# EAGLE board Thetis_RevD1_PCB (EAGLE 9.7.0)
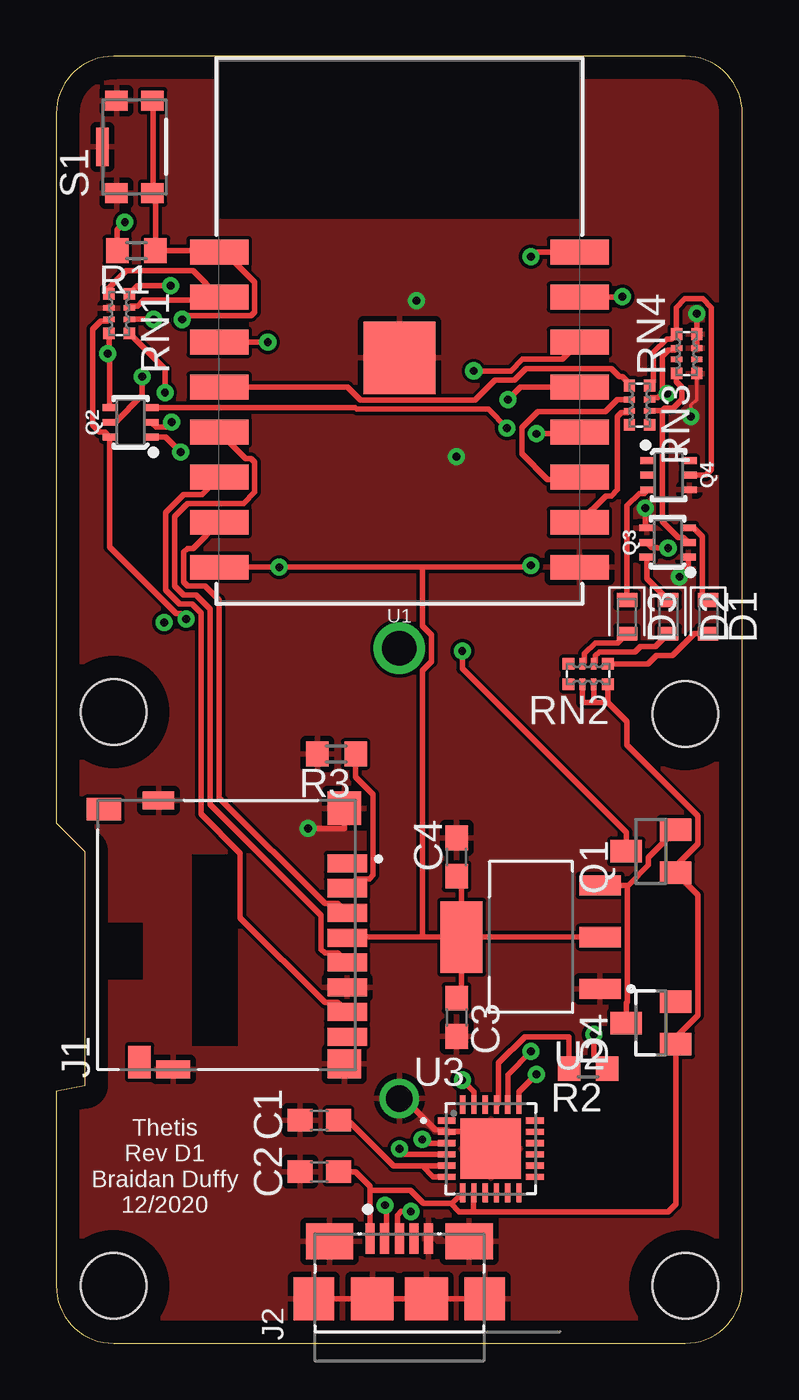
[diagram p0: board, top side]
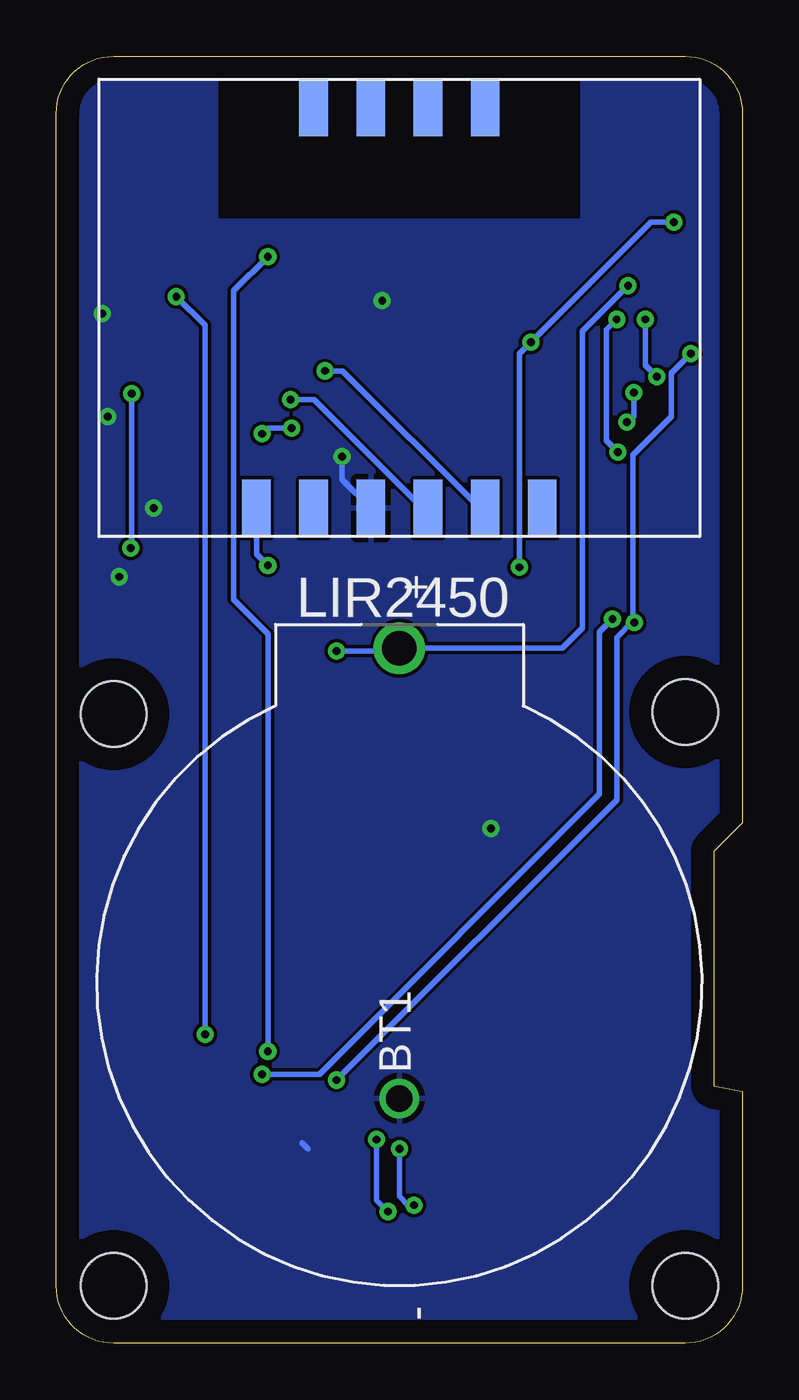
[diagram p1: board, bottom side, seen from below]

Size 30.48 x 57.15 mm. Coordinates in mm from the lower left corner, seen from the top.
Outline: 0,11.18 0,2.54 arc90 2.54,0 27.94,0 arc90 30.48,2.54 30.48,54.61 arc90 27.94,57.15 2.54,57.15 arc90 0,54.61 0,23.11 1.27,21.84 1.27,11.43 0,11.18
Copper layers (1*16): Top 0.035mm / dielectric 1.5mm / Bottom 0.035mm
Design rules "default": minimum track width 6mil, minimum drill 0.35mm, track to track 6mil, track to pad 6mil, pad to pad 6mil, via to via 6mil, smd to smd 6mil, copper to edge 40mil, drill to drill 6mil, minimum pad ring 10mil, minimum via ring 8mil, stop-mask expansion 4mil, vias tented up to drill 0mil, thermal gap 10mil
Holes 2.92 mm at 2.54,2.54 2.54,28.03 27.94,27.94 27.94,2.54
tKeepout: area 0,25.4 to 5.1,30.5; area 25.4,25.4 to 30.5,30.5; area 0,0 to 5.1,5.1; area 25.4,0 to 30.5,5.1
bKeepout: area 0,25.4 to 5.1,30.5; area 25.4,25.4 to 30.5,30.5; area 0,0 to 5.1,5.1; area 25.4,0 to 30.5,5.1

## Footprints (pad centres in the part's own frame; a part is rotated, then mirrored left to right if it is on the bottom)
BAT_BS-2450 = drill 1.52: + 14.86,0 | drill 1.17: - -5.14,0
C0603 = smd 1.1 x 1: 1 -0.85,0; 2 0.85,0
LEDC1608X65N = smd 0.612 x 0.912: A 0.75,0; C -0.75,0
SOT23 = smd 1 x 1.4: 1 -0.95,-1.1; 2 0.95,-1.1; 3 0,1.1
HRS_DM3D-SF = smd 0.8 x 1.75: 1 3.2,0; 2 2.1,0; 3 1,0; 4 -0.1,0; 5 -1.2,0; 6 -2.3,0; 7 -3.4,0; 8 -4.5,0 | smd 1.3 x 1.5: S1 -5.7,0.125 | smd 1.5 x 1.5: S2 5.65,0.125 | smd 0.8 x 1.5: S3 -5.95,7.725 | smd 0.8 x 1.4: S4 6,8.375 | smd 1 x 1.55: SW-A 5.6,10.8 | smd 1.45 x 1: SW-B -5.625,9.225
AMPHENOL_10118192-0001LF = smd 0.4 x 1.35: 1 -1.3,0; 2 -0.65,0; 3 0,0; 4 0.65,0; 5 1.3,0 | smd 2.1 x 1.6: SH1 -3.1,-0.125; SH2 3.1,-0.125 | smd 1.8 x 1.9: SH3 -3.8,-2.675; SH6 3.8,-2.675 | smd 1.9 x 1.9: SH4 -1.2,-2.675; SH5 1.2,-2.675
SC70-6 = smd 0.3 x 0.66: 1 -0.65,-0.92; 2 0,-0.92; 3 0.65,-0.92; 4 0.65,0.92; 5 0,0.92; 6 -0.65,0.92
R0603 = smd 1 x 1.1: 1 -0.85,0; 2 0.85,0
EXB28V = smd 0.525 x 0.5: 1 -0.875,-0.45; 4 0.875,-0.45; 5 0.875,0.45; 8 -0.875,0.45 | smd 0.25 x 0.5: 2 -0.25,-0.45; 3 0.25,-0.45; 6 0.25,0.45; 7 -0.25,0.45
SW_KMR221GLFS = smd 0.9 x 1: 1 -2.05,0.8; 2 -2.05,-0.8; 3 2.05,-0.8; 4 2.05,0.8 | smd 1.7 x 0.55: 5 0,1.425
ESP-12S = smd 2.6 x 1.1: 1 -8,3.5; 2 -8,1.5; 3 -8,-0.5; 4 -8,-2.5; 5 -8,-4.5; 6 -8,-6.5; 7 -8,-8.5; 8 -8,-10.5; 9 8,-10.5; 10 8,-8.5; 11 8,-6.5; 12 8,-4.5; 13 8,-2.5; 14 8,-0.5; 15 8,1.5; 16 8,3.5 | smd 3.2 x 3.2: P$1 0,-1.2
SOT230P700X180-4N = smd 1.86 x 0.9: 1 -3.075,2.3; 2 -3.075,0; 3 -3.075,-2.3 | smd 1.86 x 3.19: 4 3.075,0
QFN50P400X400X80-25N = smd 0.81 x 0.26: 1 -1.955,1.25; 2 -1.955,0.75; 3 -1.955,0.25; 4 -1.955,-0.25; 5 -1.955,-0.75; 6 -1.955,-1.25; 13 1.955,-1.25; 14 1.955,-0.75; 15 1.955,-0.25; 16 1.955,0.25; 17 1.955,0.75; 18 1.955,1.25 | smd 0.26 x 0.81: 7 -1.25,-1.955; 8 -0.75,-1.955; 9 -0.25,-1.955; 10 0.25,-1.955; 11 0.75,-1.955; 12 1.25,-1.955; 19 1.25,1.955; 20 0.75,1.955; 21 0.25,1.955; 22 -0.25,1.955; 23 -0.75,1.955; 24 -1.25,1.955 | smd 2.68 x 2.68: 25 0,0
ADAFRUIT-BNO055-BREAKOUT-SMD = smd 2.54 x 1.27: P$1 -8.89,6.35; P$2 -8.89,3.81; P$3 -8.89,1.27; P$4 -8.89,-1.27; P$5 -8.89,-3.81; P$6 -8.89,-6.35; P$7 8.89,3.81; P$8 8.89,1.27; P$9 8.89,-1.27; P$10 8.89,-3.81

## Placement (x,y rotation side)
BT1  BS-2450  [BAT_BS-2450]  15.24,16 90 bottom
C1  1 uF  [C0603]  11.68,9.91 180 top
C2  1 uF  [C0603]  11.68,7.62 180 top
C3  10 uF  [C0603]  17.78,14.48 270 top
C4  10 uF  [C0603]  17.78,21.59 90 top
D1  GRN  [LEDC1608X65N]  28.96,32.26 270 top
D2  GRN  [LEDC1608X65N]  27.18,32.26 270 top
D3  GRN  [LEDC1608X65N]  25.35,32.26 270 top
D4  BAT400  [SOT23]  26.42,14.22 90 top
J1  DM3D-SF  [HRS_DM3D-SF]  12.92,18.11 90 top
J2  10118192-0001LF  [AMPHENOL_10118192-0001LF]  15.24,4.64 0 top
Q1  DMG3414U-7  [SOT23]  26.42,21.84 90 top
Q2  MMBT2222N  [SC70-6]  3.3,40.89 90 top
Q3  MMBT2222N  [SC70-6]  27.16,35.56 90 top
Q4  MMBT2222N  [SC70-6]  27.2,38.55 270 top
R1  10k  [R0603]  3.56,48.51 180 top
R2  1k  [R0603]  23.62,12.19 180 top
R3  10k  [R0603]  12.45,26.16 180 top
RN1  10k  [EXB28V]  2.79,45.72 270 top
RN2  1k  [EXB28V]  23.62,29.72 180 top
RN3  1k  [EXB28V]  25.91,41.66 270 top
RN4  10k  [EXB28V]  28,43.94 90 top
S1  KMR221GLFS  [SW_KMR221GLFS]  3.48,53.13 90 top
U1  ESP-12S  [ESP-12S]  15.24,44.96 0 top
U2  AZ1117EH-5.0TRG1  [SOT230P700X180-4N]  21.08,18.03 180 top
U3  CP2104-F03-GM  [QFN50P400X400X80-25N]  19.3,8.64 0 top
U4  ADAFRUIT-BNO055-BREAKOUT-SMD  [ADAFRUIT-BNO055-BREAKOUT-SMD]  15.24,45.97 90 bottom

## Library data of the parts
BT1 = BS-2450; AVAILABILITY: Unavailable; DESCRIPTION: Battery Holder _Open_ Coin, 24.5mm 1 Cell PC Pin; MF: MPD; MP: BS-2450; PACKAGE: Non-Standard MPD; PRICE: None
C1-C4 = rcl; SPICEPREFIX: C
D1-D3 = LED; CATEGORY: LED; COLOR: GREEN; DESCRIPTION: CHIP LED ROUND; SUB-CATEGORY: CHIP; TYPE: ROUND_TOP
D4 = diode
J1 = DM3D-SF; MANUFACTURER: Hirose; MAXIMUM_PACKAGE_HEIGHT: 1.55mm; PARTREV: 2017.1; STANDARD: Manufacturer Recommendations
J2 = MicroUSB; MANUFACTURER: Amphenol; PARTREV: B; STANDARD: Manufacturer Recommendation
Q1 = Transistor; CATEGORY: Transistor; SUB-CATEGORY: MOSFET; TYPE: N-Channel
Q2-Q4 = SparkFun-DiscreteSemi-Poseidon-Edit; PROD_ID: TRANS-13337
R1-R3 = rcl; SPICEPREFIX: R
RN1-RN4 = resistor-dil-Poseidon-Edit; OC_FARNELL: unknown; OC_NEWARK: unknown
S1 = KMR221GLFS; MANUFACTURER: CnK
U1 = ESP-12S; PROD_ID: IC-14115
U2 = AZ1117EH-5.0TRG1; ARROW_ELECTRONICS-PURCHASE-URL: https://snapeda.com/shop?store=Arrow+Electronics&id=482930; AVAILABILITY: Good; DESCRIPTION: Linear Voltage Regulator IC 1 Output 1A SOT-223; DIGIKEY-PURCHASE-URL: https://snapeda.com/shop?store=DigiKey&id=482930; MF: Diodes Inc.; MOUSER-PURCHASE-URL: https://snapeda.com/shop?store=Mouser&id=482930; MP: AZ1117EH-5.0TRG1; PACKAGE: SOT-223 Diodes Inc.; PRICE: None
U3 = CP2104; MANUFACTORER: Silicon Labs; PARTREV: 1.0; STANDERD: IPC-7351B
U4 = EVE-ECAD-Library

## Nets
3.3V: C3.1 C4.1 J1.4 R1.2 U1.3 U1.8 U2.2 U2.4 U4.P$1
3V3: U4.P$2
!DTR: Q2.4 RN1.4 U3.23
!RTS: Q2.6 RN1.3 U3.19
ACAL_LED: RN3.3 U1.10
ADC: RN1.1 RN1.7 U1.2
ESP_RX: R2.1 U1.15
ESP_TX: U1.16 U3.20
GCAL_LED: RN3.2 U1.11
GND: BT1.- C1.2 C2.2 C3.2 C4.2 J1.6 J1.S1 J1.S2 J1.S3 J1.S4 J2.5 J2.SH1 J2.SH2 J2.SH3 J2.SH4 J2.SH5 J2.SH6 Q3.1 Q3.4 Q4.4 R3.2 RN1.2 RN4.1 RN4.3 RN4.4 S1.1 S1.4 S1.5 U1.9 U1.P$1 U2.1 U3.2 U3.25 U4.P$3
IO0: Q2.3 U1.12
MCAL_LED: RN3.1 U1.4
MISO: J1.7 U1.6
MOSI: J1.3 U1.7
N$1: J1.2 R3.1
N$2: C1.1 U3.5 U3.6
N$3: R2.2 U3.21
N$4: J2.3 U3.3
N$5: J2.2 U3.4
N$6: Q3.5 RN3.7 RN4.6
N$7: Q2.2 RN1.5
N$8: D1.C Q3.3
N$9: Q2.5 RN1.6
N$10: D1.A RN2.1
N$11: D2.A RN2.2
N$12: D2.C Q3.6
N$13: D4.3 Q1.2 U2.3
N$14: Q3.2 RN3.6 RN4.8
N$15: Q4.5 RN3.8 RN4.5
N$16: D3.C Q4.3
N$17: D3.A RN2.3
RST: Q2.1 R1.1 S1.2 S1.3 U1.1
SCK: J1.5 U1.5
SCL: U1.14 U4.P$5
SDA: U1.13 U4.P$4
V_BATT: BT1.+ Q1.3 RN1.8
V_USB: C2.1 D4.1 J2.1 Q1.1 RN2.6 RN2.7 RN2.8 U3.7 U3.8

## Tracks (layer width: path | path; a pad name or v marks a point on that pad's centre or on a via)
3.3V  (via drill 0.35)
  Top 0.254: U2.4 18.01,20.51 C4.1 | U2.4 18.01,15.55 C3.1 | U2.2 U2.4 | U1.8 v9.91,34.46 16.26,34.46 | 16.26,34.46 21,34.46 v21.08,34.54 | U2.4 16.26,18.03 | 16.26,18.03 12.95,18.03 J1.4 | 16.26,34.46 16.26,31.86 16.66,31.45 16.66,30.28 16.26,29.87 16.26,18.03 | R1.2 2.71,49.44 v3.05,49.78 | v9.4,44.45 U1.3
  Bottom 0.254: v21.08,34.54 21.59,35.05 U4.P$1 | v3.05,49.78 4.06,49.78 v9.4,44.45 9.91,43.94 v9.91,34.46
!DTR  (via drill 0.35)
  Top 0.254: U3.23 18.55,11.16 v18.03,11.68 | RN1.4 2.34,44 v2.29,43.94 2.38,43.85 Q2.4
  Bottom 0.254: v18.03,11.68 5.59,24.13 5.59,31.34 4.86,32.06 | 4.86,32.06 v4.8,32 | 4.86,32.06 4.86,39.43 3.15,41.14 3.15,43.08 v2.29,43.94
!RTS  (via drill 0.35)
  Top 0.254: U3.19 20.55,11.16 v21.34,11.94 | v5.77,32.16 5.52,32.41 5.32,32.41 2.38,35.35 Q2.6 2.16,40.47 1.94,40.47 1.63,40.77 1.63,45.04 1.98,45.39 2.26,45.39 RN1.3
  Bottom 0.254: v21.34,11.94 18.8,11.94 6.35,24.38 6.35,31.58 v5.77,32.16
ACAL_LED
  Top 0.254: U1.10 24.41,37.63 24.66,37.63 24.93,37.9 24.93,41.16 25.09,41.32 25.38,41.32 RN3.3
ADC
  Top 0.254: RN1.7 3.33,46.05 3.61,46.05 3.87,46.31 7.24,46.31 U1.2 6.07,47.63 3.1,47.63 2.21,46.73 RN1.1
ESP_RX  (via drill 0.35)
  Top 0.254: R2.1 23.88,12.79 v23.88,13.72 | v25.15,46.48 25.12,46.46 U1.15
  Bottom 0.254: v23.88,13.72 23.88,45.21 v25.15,46.48
ESP_TX  (via drill 0.35)
  Top 0.254: U3.20 20.05,11.93 v21.08,12.95 | v21.08,48.26 21.28,48.46 U1.16
  Bottom 0.254: v21.08,12.95 21.08,31.5 22.61,33.02 22.61,46.74 v21.08,48.26
GCAL_LED
  Top 0.254: U1.11 23.14,38.36 21.82,38.36 20.68,39.5 20.68,40.66 21.39,41.38 24.4,41.38 24.93,41.91 RN3.2
GND  (via drill 0.35)
  Top 0.152: RN4.1 28.45,42.42 | 28.45,42.42 | 28.45,42.42 28.45,41.91 28.19,41.66 v28.19,41.15
  Top 0.254: v28.45,45.72 RN4.4 RN4.3 | J2.SH3 J2.SH4 J2.SH5 J2.SH6 | J1.S2 12.79,22.86 v11.18,22.86 | U3.25 19.3,9.4 U3.2 17.26,9.48 16.84,9.48 15.45,10.86 BT1.- | Q3.1 28.08,34.43 v27.69,34.04 | Q3.4 26.16,36.29 v26.16,37.08
  Bottom 0.152: v28.19,41.15 28.19,40.89
  Bottom 0.254: U3.25 19.56,8.89 | v16,46.3 16,46.48 | U4.P$3 17.78,38.35 v17.78,39.37
  pour Top: -2.92,-1.91 34.16,-1.91 34.16,58.8 -2.92,58.8
  pour Bottom: -2.92,-1.91 34.16,-1.91 34.16,58.8 -2.92,58.8
IO0  (via drill 0.35)
  Top 0.254: v21.34,40.39 23.17,40.39 U1.12 | Q2.3 4.59,41.54 4.6,41.56 13.27,41.56 13.36,41.47 19.19,41.47 v20.02,40.64
  Bottom 0.254: v20.02,40.64 21.08,40.64 v21.34,40.39
MCAL_LED
  Top 0.254: U1.4 12.95,42.46 13.52,41.88 18.6,41.88 19.49,42.77 20.36,42.77 20.87,43.29 24.66,43.29 25.02,42.93 25.15,42.93 25.46,42.61 RN3.1
MISO
  Top 0.254: J1.7 12.5,15.13 11.93,15.13 8.17,18.89 8.17,21.76 6.43,23.5 6.43,32.43 6.04,32.82 5.49,32.82 4.85,33.46 4.85,36.89 5.66,37.69 6.48,37.69 U1.6
MOSI
  Top 0.254: J1.3 12.5,19.53 11.93,19.53 7.24,24.22 7.24,33.01 6.62,33.63 5.82,33.63 5.66,33.79 5.66,35.12 5.82,35.29 6.07,35.29 U1.7
N$1
  Top 0.254: R3.1 13.3,25.15 14.07,24.37 14.07,20.79 13.91,20.63 13.34,20.63 J1.2
N$2
  Top 0.254: C1.1 12.95,9.91 14.99,7.87 16.26,7.87 | 16.26,7.87 17.34,7.87 U3.5 | U3.6 16.74,7.39 16.26,7.87
N$3
  Top 0.254: R2.2 22.77,13.61 20.81,13.61 19.64,12.45 19.64,10.68 U3.21
N$4  (via drill 0.35)
  Top 0.254: U3.3 16.41,8.89 v16.26,9.04 | J2.3 15.16,4.72 15.16,5.69 15.32,5.85 v15.75,5.85
  Bottom 0.254: v16.26,9.04 16.26,6.36 v15.75,5.85
N$5  (via drill 0.35)
  Top 0.254: U3.4 15.49,8.39 v15.24,8.64 | J2.2 14.67,4.72 14.67,6.06 v14.6,6.13
  Bottom 0.254: v14.6,6.13 14.85,6.13 15.24,6.52 v15.24,8.64
N$6  (via drill 0.35)
  Top 0.254: RN4.6 27.46,44.1 27.19,44.1 26.92,43.83 26.92,42.19 26.91,42.18 | v27.18,35.3 26.72,35.3 26.68,35.34 26.46,35.34 Q3.5 | v27.14,42.18 26.91,42.18 | 26.91,42.18 26.72,41.99 26.44,41.99 RN3.7
  Bottom 0.254: v27.14,42.18 27.14,35.34 v27.18,35.31 v27.18,35.3
N$7  (via drill 0.35)
  Top 0.254: Q2.2 4.44,40.67 4.9,40.67 v5.13,40.9 | RN1.5 4.83,43.26 v4.83,42.22
  Bottom 0.254: v4.83,42.22 4.83,41.16 5.13,40.85 v5.13,40.9
N$8
  Top 0.254: Q3.3 28.11,36.24 28.27,36.24 28.69,35.83 28.69,33.28 D1.C
N$9  (via drill 0.35)
  Top 0.254: RN1.6 v4.31,45.47 v4.32,45.47 | Q2.5 2.61,40.89 3.81,42.1 v3.81,42.93
  Bottom 0.254: v4.32,45.47 4.32,43.43 v3.81,42.93
N$10
  Top 0.254: D1.A 28.34,31.51 27.37,30.54 26.65,30.54 26.27,30.17 RN2.1
N$11
  Top 0.254: D2.A 26.62,30.95 25.94,30.95 25.69,30.7 24.12,30.7 23.95,30.53 23.95,30.25 RN2.2
N$12
  Top 0.254: D2.C 26.24,33.95 Q3.6
N$13
  Top 0.254: Q1.2 26.3,21.57 26.3,21.23 25.4,20.33 | 25.4,20.33 U2.3 | D4.3 25.32,15.12 25.37,15.17 25.37,20.3 25.4,20.33
N$14
  Top 0.254: RN3.6 26.92,41.41 | Q3.2 27.86,35.78 27.63,35.78 26.92,36.49 26.92,41.41 | 26.92,41.41 27.04,41.52 27.41,41.52 27.8,41.9 27.8,42.45 27.55,42.69 RN4.8
N$15
  Top 0.254: RN3.8 26.52,42.69 26.52,44 27.11,44.6 27.33,44.6 RN4.5 27.54,44.83 27.54,45.99 27.92,46.38 28.72,46.38 29.11,45.99 29.11,38.8 28.85,38.55 Q4.5
N$16
  Top 0.254: Q4.3 26.12,37.74 25.89,37.74 25.35,37.2 D3.C
N$17
  Top 0.254: D3.A 24.94,31.1 23.95,31.1 23.47,30.62 23.47,30.26 RN2.3
RST  (via drill 0.35)
  Top 0.254: 4.31,51.05 4.41,50.95 R1.1 7.18,48.51 U1.1 7.49,48.46 8.82,47.12 8.82,45.79 8.66,45.63 5.75,45.63 v5.59,45.47 | 4.31,51.05 S1.2 | S1.3 4.31,55.15 4.31,51.05 | Q2.1 4.85,40.24 v5.53,39.57
  Bottom 0.254: v5.53,39.57 6.04,40.08 6.04,45.02 v5.59,45.47
SCK
  Top 0.254: J1.5 12.5,17.33 11.93,17.33 11.76,17.49 11.76,19 6.83,23.93 6.83,32.6 6.21,33.22 5.66,33.22 5.25,33.62 5.25,36.72 5.82,37.29 8.31,37.29 8.82,37.79 8.82,39.12 8.66,39.29 8.41,39.29 U1.5
SCL  (via drill 0.35)
  Top 0.254: U1.14 22.48,43.69 20.7,43.69 20.19,43.18 v18.54,43.18
  Bottom 0.254: v18.54,43.18 17.77,43.18 11.67,37.08 U4.P$5
SDA  (via drill 0.35)
  Top 0.254: U1.13 20.61,42.46 v20.07,41.91
  Bottom 0.254: U4.P$4 14.21,37.08 19.04,41.91 v20.07,41.91
V_BATT  (via drill 0.35)
  Top 0.254: Q1.3 25.32,22.69 18.03,29.97 v18.03,30.73 | RN1.8 3.62,46.97 v5.08,46.97
  Bottom 0.254: v5.08,46.97 7.11,44.94 7.11,31.75 8,30.86 BT1.+ 15.37,30.73 v18.03,30.73
V_USB
  Top 0.254: C2.1 13.3,7.62 13.94,6.98 13.94,6.79 | J2.1 13.94,6.79 | U3.7 17.59,6.21 17.53,6.21 | U3.8 18.54,6.67 18.54,5.84 | 18.54,5.84 17.9,5.84 17.53,6.21 | 18.54,5.84 27.2,5.84 27.52,6.16 D4.1 27.52,13.58 28.5,14.56 28.5,19.91 Q1.1 27.52,21.2 28.5,22.18 28.5,23.41 25.34,26.57 25.34,27.61 24.5,28.45 | RN2.6 23.37,28.45 23.87,28.45 | RN2.7 23.87,28.45 | RN2.8 24.5,28.45 | 23.87,28.45 24.5,28.45 | 17.53,6.21 16.31,6.21 15.73,6.79 13.94,6.79

## Text on the board
tSilk: Thetis / Rev D1 / Braidan Duffy / 12/2020
_bsilk: LIR2450